# Altium PCB MP2359-3.3v.PcbDoc
Units mil, origin at the board's own origin, x right, y up, seen from the top; angles counter-clockwise.
Board outline 900 x 654 mil, 2 copper layers (Top Layer, Bottom Layer); 14 components, 8 nets, 57 pads, 2 vias.
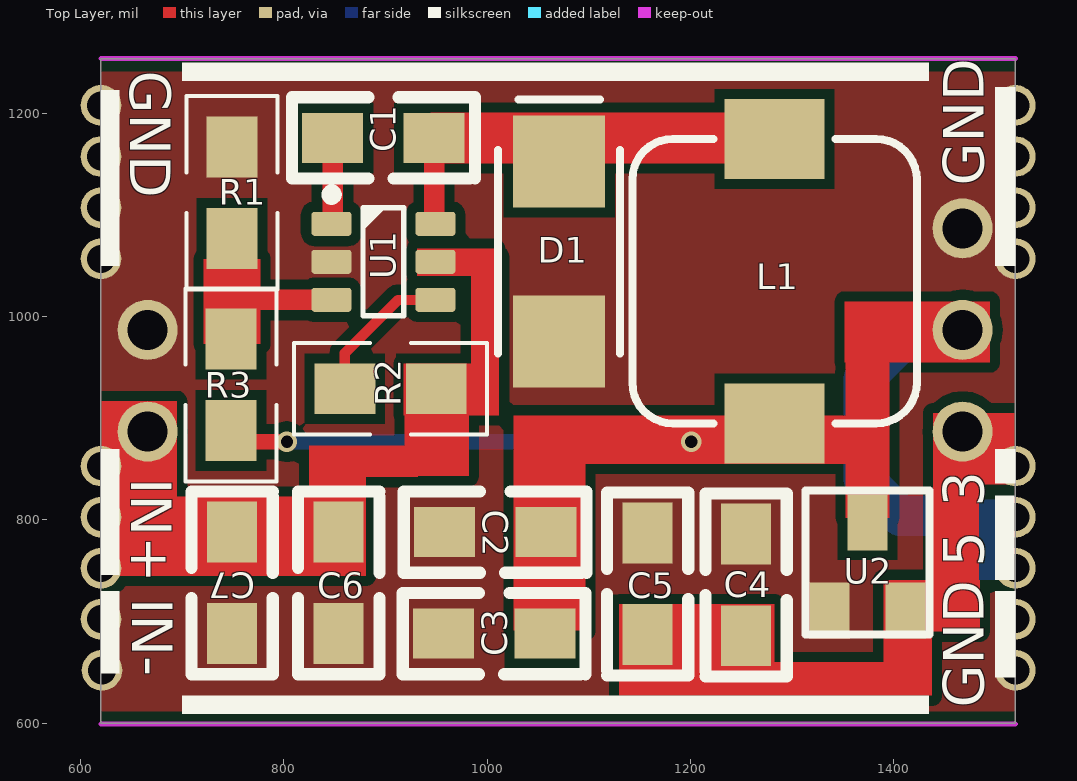
[diagram p0: Top Layer view]
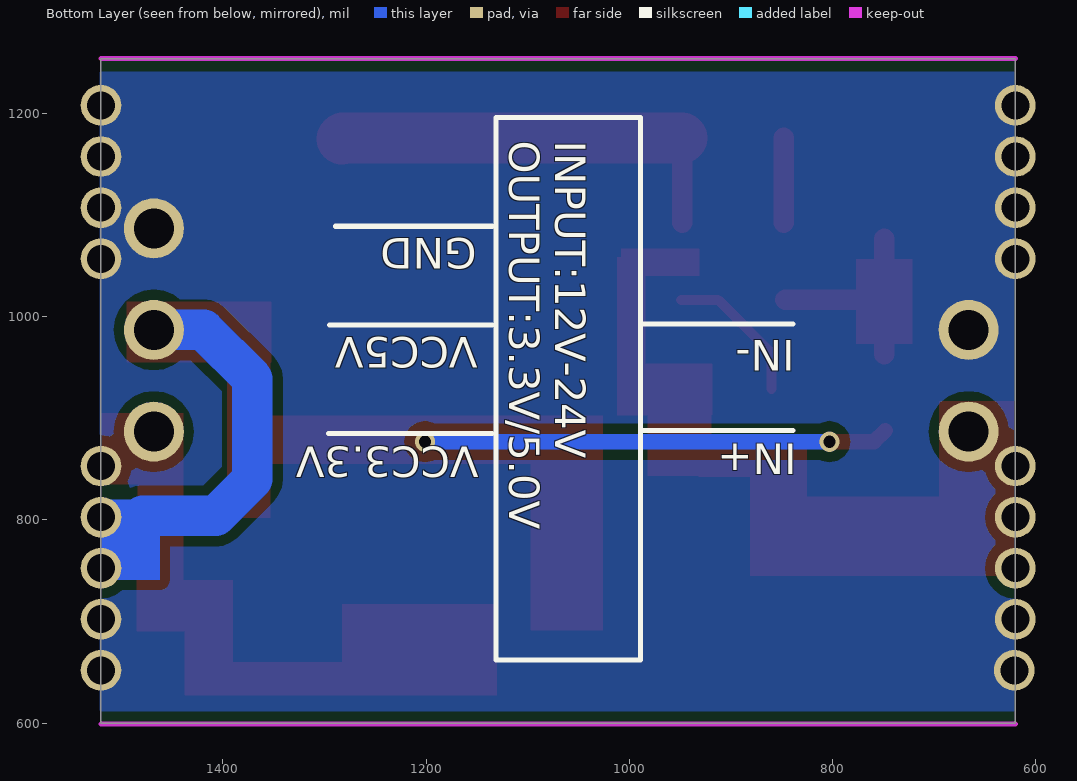
[diagram p1: Bottom Layer view, seen from below]
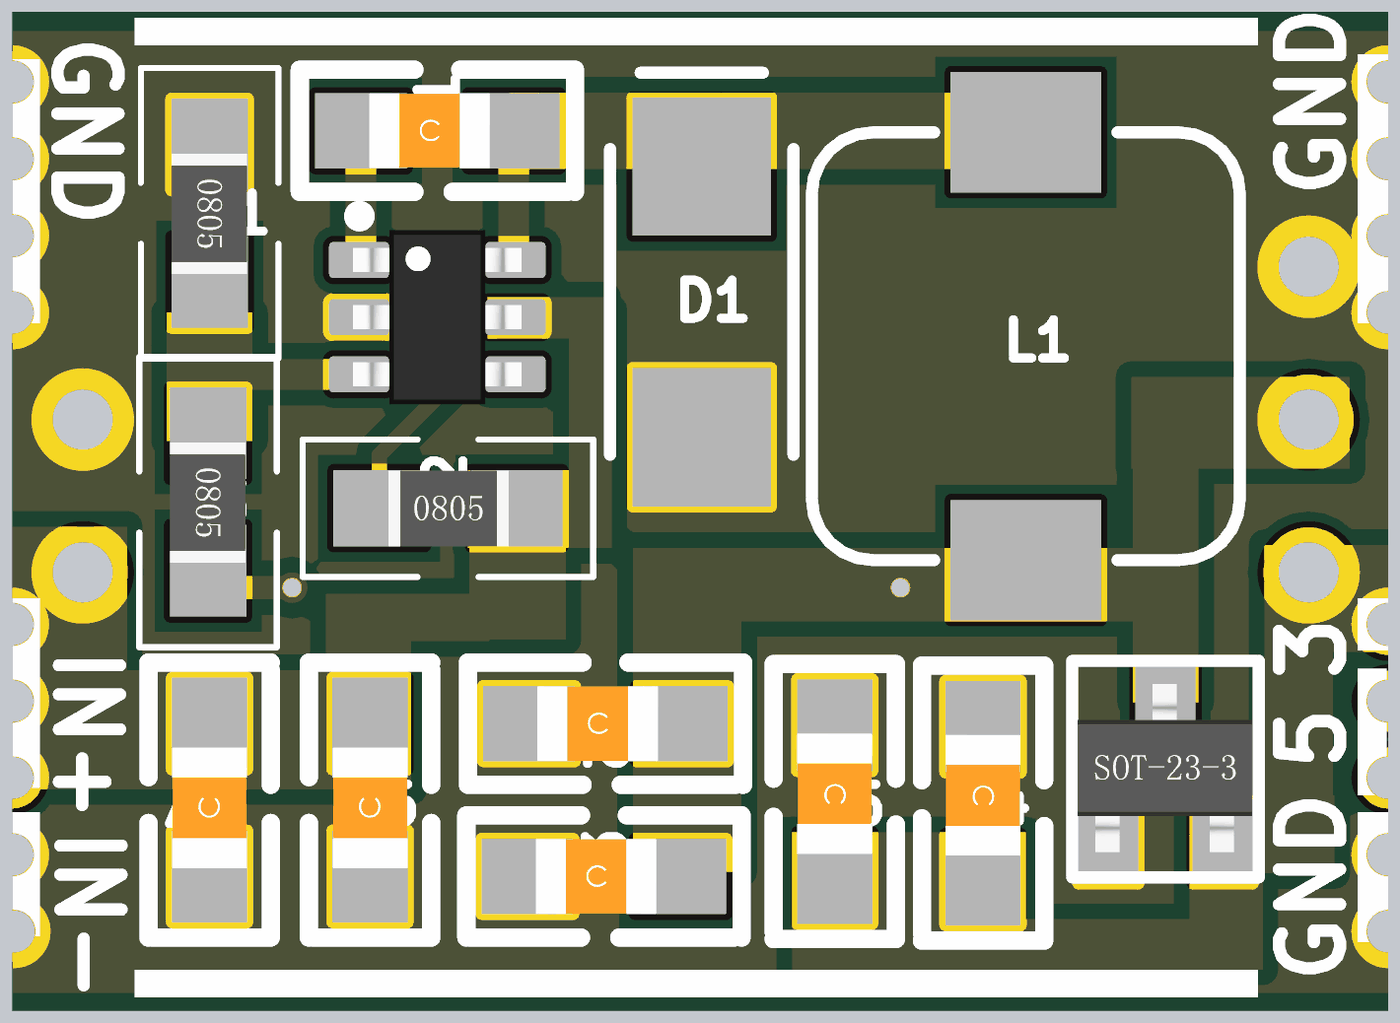
[diagram p2: 3D render of the assembled board from above, using the file's embedded part models]

## Layer stack, top to bottom
Top Solder: solder mask 0.4, Solder Resist, Dk 3.5
Top Layer: signal copper 1.4
Dielectric 1: dielectric 12.6, FR-4, Dk 4.8
Bottom Layer: signal copper 1.4
Bottom Solder: solder mask 0.4, Solder Resist, Dk 3.5

## Board outline
620,600 1520,600 1520,1254 620,1254

## Design rules (kind name [scope] priority, off if disabled: settings)
Clearance [All] p1: gap=10
ComponentClearance [All] p1 off: gap=10 collisioncheckmode=3 verticalgap=10 showdistances=FALSE
Height [All] p1 off: minheight=0 maxheight=1000 prefheight=500
MinimumSolderMaskSliver [All] p1 off: minsoldermaskwidth=10
PlaneConnect [All] p1: planeconnectstyle=Direct reliefexpansion=20 reliefentries=4 reliefconductorwidth=10 reliefairgap=10
PolygonConnect [All] p1: connectstyle=Direct reliefconductorwidth=10 reliefentries=4 polygonreliefangle="90 Angle" airgapwidth=10
RoutingVias [All] p1: holewidth=28 width=50 viastyle="Through Hole" minholewidth=28 minwidth=50 maxholewidth=28 maxwidth=50
SilkToSilkClearance [All] p1 off: silktosilkclearance=10
SilkToSolderMaskClearance [IsPad] p1 off: minsilkscreentomaskgap=10 clearancetoexposedcopper=TRUE
SolderMaskExpansion [All] p1: expansion=4
Width [All] p1: maxlimit=100 minlimit=10 preferedwidth=10
24 further rules are at their usual default settings.

## Components (designator, comment, footprint, x,y, rotation, side; value= is the part's Value field where it differs from the comment)
C1 "103" C_0805 898,1176 r0 top
C2 "104" C_0805 1008,788 r0 top
C3 "105" C_0805 1007,688 r0 top
C4 "104" C_0805 1255,736 r270 top
C5 "105" C_0805 1158,737 r270 top
C6 "105" C_0805 854,738 r90 top
C7 "104" C_0805 749,738 r90 top
D1 "Diode" DIODE-SMA 1071,1064 r90 top
L1 "Inductor" L-SMD-7 1283,1035 r270 top
R1 "9.53K" R0805 749,1167 r270 top
R2 "100K" R0805 860,929 r0 top
R3 "49.9K" R0805 748,978 r270 top
U1 "MP2359" SOT23-6 898,1054 r0 top
U2 "ME6209_SOT233" "SOT-23 - duplicate1" 1337,711 r0 top

## Footprints (in the part's own frame and the unit in brackets; to place one, negate y for a bottom-side part, rotate by r counter-clockwise, add the part's x,y. Pads: shape width x height; smd on the part's side, far side on the other; paste and mask are expansions set on the pad)
C_0805 [mil]
  rect 60x49.21 smd: 1(-50,0) 2(50,0)
  silkscreen extent -90,-40 90,40, body extent -45,-25 34,25, height 36
DIODE-SMA [mm] "贴片二极管"
  rect 2.3x2.3 smd: 1(-2.25,0) 2(2.25,0)
  silkscreen extent -2.54,-1.52 3.81,1.52, body extent -2.92,-1.4 2.92,1.4, height 3
L-SMD-7 [mm] "贴片电感7*7"
  rect 2x2.5 smd: 1(-3.556,0) 2(3.556,0)
  silkscreen extent -3.56,-3.56 3.56,3.56, body extent -3.56,-3.56 3.56,3.56, height 4
R0805 [mil]
  rect 60x50 smd: 1(0,0) 2(90,0)
  silkscreen extent -50,-45 140,45, body extent 6,-25 85,25, height 22
SOT23-6 [mm]
  round 0.5 on Mech14: 0(0,0)
  rrect25% 1x0.6 smd: 1(-1.3,0.95) 2(-1.3,0) 3(-1.3,-0.95) 4(1.3,-0.95) 5(1.3,0) 6(1.3,0.95)
  silkscreen extent -1.42,-1.35 0.51,1.81, body extent -1.4,-1.45 1.4,1.45, height 1.44
"SOT-23 - duplicate1" [mm]
  rect 1x1.4 smd: 1(0,0) 2(1.9,0) 3(0.95,2.2)
  silkscreen extent -0.6,-0.6 2.5,3, body extent -0.51,-0.18 2.39,2.62

## Part data
C1 C2 C3 C4 C5 C6 C7: library part C
D1: "二极管"
L1: "电感"
R1 R2 R3: library part R
U2: library part ME6209

## Free pads (board coordinates)
  round 40 hole 27.56: 33(620,702.25) 33(620,752.5) 33(620,802.75) 33(620,853) 33(620,1057) 33(620,1107.33) 33(620,1157.67) 33(620,1208) 33(621,652) 33(1520,652) 33(1520,702.25) 33(1520,752.5) 33(1520,802.75) 33(1520,853) 33(1520,1057) 33(1520,1107.33) 33(1520,1157.67) 33(1520,1208)
  round 59.06 hole 39.37: 35(666,887) 35(666,987) 35(1468,887) 35(1468,987) 35(1468,1087)

## Via types
v1: diameter 20, hole 12, Top Layer to Bottom Layer, tented both sides, 2 vias

## Nets (pads, with @x,y where several pads share a name; then routed paths per layer and width w, separated by ;. In a path a pad name is that pad's centre, name@x,y a point inside that pad or via, vN(x,y) a via of type N, cw(c..) or ccw(c..) an arc to the next point about the centre after c; other vN are vias at no path point)
GND: C2.1 C3.1 C4.1 C5.1 C6.1 C7.1 D1.1 pad.33@620,702.25 pad.33@620,1057 pad.33@620,1107.33 pad.33@620,1157.67 pad.33@620,1208 pad.33@621,652 pad.33@1520,652 pad.33@1520,702.25 pad.33@1520,1057 pad.33@1520,1107.33 pad.33@1520,1157.67 pad.33@1520,1208 pad.35@666,987 pad.35@1468,1087 R1.1 U1.2 U2.1
IN: C6.2 C7.2 pad.33@620,752.5 pad.33@620,802.75 pad.33@620,853 pad.35@666,887 R2.2 U1.5
NetC1_1: C1.1 U1.1 | length 83.4
  Top Layer w20: U1.1@848,1092.58 C1.1
NetC1_2: C1.2 D1.2 L1.1 U1.6 | length 418.8
  Top Layer w20: U1.6@948,1092.58 C1.2
  Top Layer w50: C1.2 1282,1176 L1.1
NetR1_2: R1.2 R3.1 U1.3 | length 209.4
  Top Layer w20: R3.1@749,963 R1.2 ; 751.4,1016.6 U1.3
NetR2_1: R2.1 U1.4 | length 146
  Top Layer w10: R2.1 860,964 912.6,1016.6 U1.4
VCC3V: C4.2 C5.2 pad.33@1520,853 pad.35@1468,887 U2.2
VCC5V: C2.2 C3.2 L1.2 pad.33@1520,752.5 pad.33@1520,802.75 pad.35@1468,987 R3.2 U2.3 | length 860.4
  Top Layer w15: R3.2 759,877 v1(803,877) ; v1(1201,877) L1.2@1265,877
  Bottom Layer w15: v1(803,877) v1(1201,877)
  Bottom Layer w40: pad.35@1468,987 1419,987 1371,939 1371,840 1407,804 1479,804
pads on no net: U1.0

## Polygon pours and split planes (outlines as drawn)
GND on Bottom Layer "AutoNaming" (solid, pour order 38): 621,1253.17 621,598.17 1521,598.17 1521,1253.17
GND on Top Layer "AutoNaming" (solid, pour order 40): 620.39,1253 620.39,598 1520.39,598 1520.39,1253

## Keep-outs
Keep-Out Layer:
  lines w5: 620,599 1520,599 ; 620,1254 1520,1254

## Other copper
Top Layer:
  rectangle net VCC3V: 1439,835 1520,905
  rectangle net VCC5V: 1352,955 1495,1015
  rectangle net VCC3V: 1439,702 1484,905
  rectangle net VCC3V: 1426,690 1485,741
  rectangle net IN: 620,799 695,917
  rectangle net VCC5V: 1353,802 1396,1007
  rectangle net VCC5V: 1026,855 1395,903
  rectangle net NetR1_2: 721,973 777,1057
  rectangle net IN: 825,753 881,873
  rectangle net IN: 825,842 932,873
  rectangle net IN: 919,843 982,908
  rectangle net IN: 620,745 881,823
  rectangle net VCC5V: 1026,691 1097,892
  rectangle net VCC3V: 1390,645 1438,741
  rectangle net VCC3V: 1130,627 1438,660
  rectangle net VCC3V: 1130,650 1283,717
  rectangle net IN: 918,903 1012,954
  rectangle net IN: 984,903 1012,1059
  rectangle net IN: 931,1040 1008,1067
Bottom Layer:
  rectangle net VCC5V: 1462,741 1520,820

## Silkscreen, mask and mechanical layers (free items; w line width, h text height)
Top Overlay:
  rectangle: 1500,1050 1520,1226
  rectangle: 620,1050 638,1223
  region: 1435,1232 1435,1250 700,1250 700,1232
  region: 1435,609 1435,627 700,627 700,609
  rectangle: 620,649 638,730
  rectangle: 620,746 638,870
  rectangle: 1500,645 1520,730
  rectangle: 1500,836 1520,870
  rectangle: 1500,741 1519,824
  text "GND" at 649,1242 h40 r270
  text "GND" at 1489,1129 h40 r90
  text "IN+" at 650,841 h40 r270
  text "3" at 1489,813 h40 r90
  text "5" at 1489,754 h40 r90
  text "IN-" at 651,723 h40 r270
  text "GND" at 1489,615 h40 r90
Bottom Overlay:
  lines w5: 839,888 987,888 ; 839,993 987,993 ; 1135,885 1296,885 ; 1135,992 1295,992 ; 1135,1089 1289,1089 ; 989,662 989,1196 1131,1196 1131,662 989,662
  text "INPUT:12V-24V / OUTPUT:3.3V/5.0V" at 1118,1173 h30 r90
  text "GND" at 1150,1077 h30 r180
  text "VCC5V" at 1149,980 h30 r180
  text "IN-" at 837,977 h30 r180
  text "IN+" at 835,875 h30 r180
  text "VCC3.3V" at 1148,872 h30 r180